# Altium PCB PCB1.PcbDoc (part 1 of 2)
Units mil, origin at the board's own origin, x right, y up, seen from the top; angles counter-clockwise.
Board outline 1275 x 805 mil, 4 copper layers (Top Layer, signal, gnd, Bottom Layer), stack 23.756 mil thick; 62 components, 87 nets, 336 pads, 208 vias.
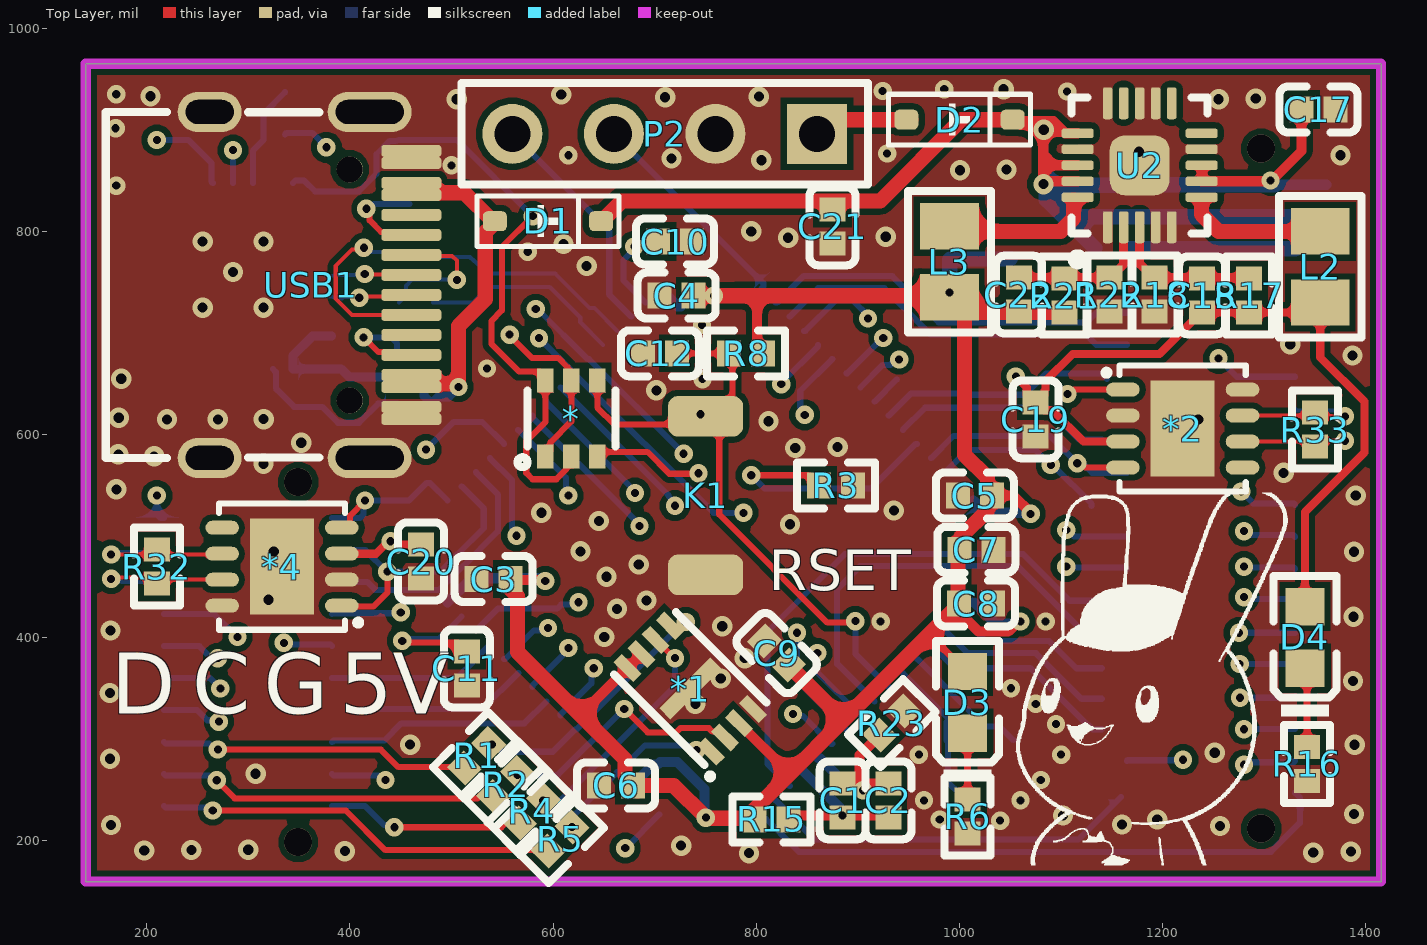
[diagram p0: Top Layer view]
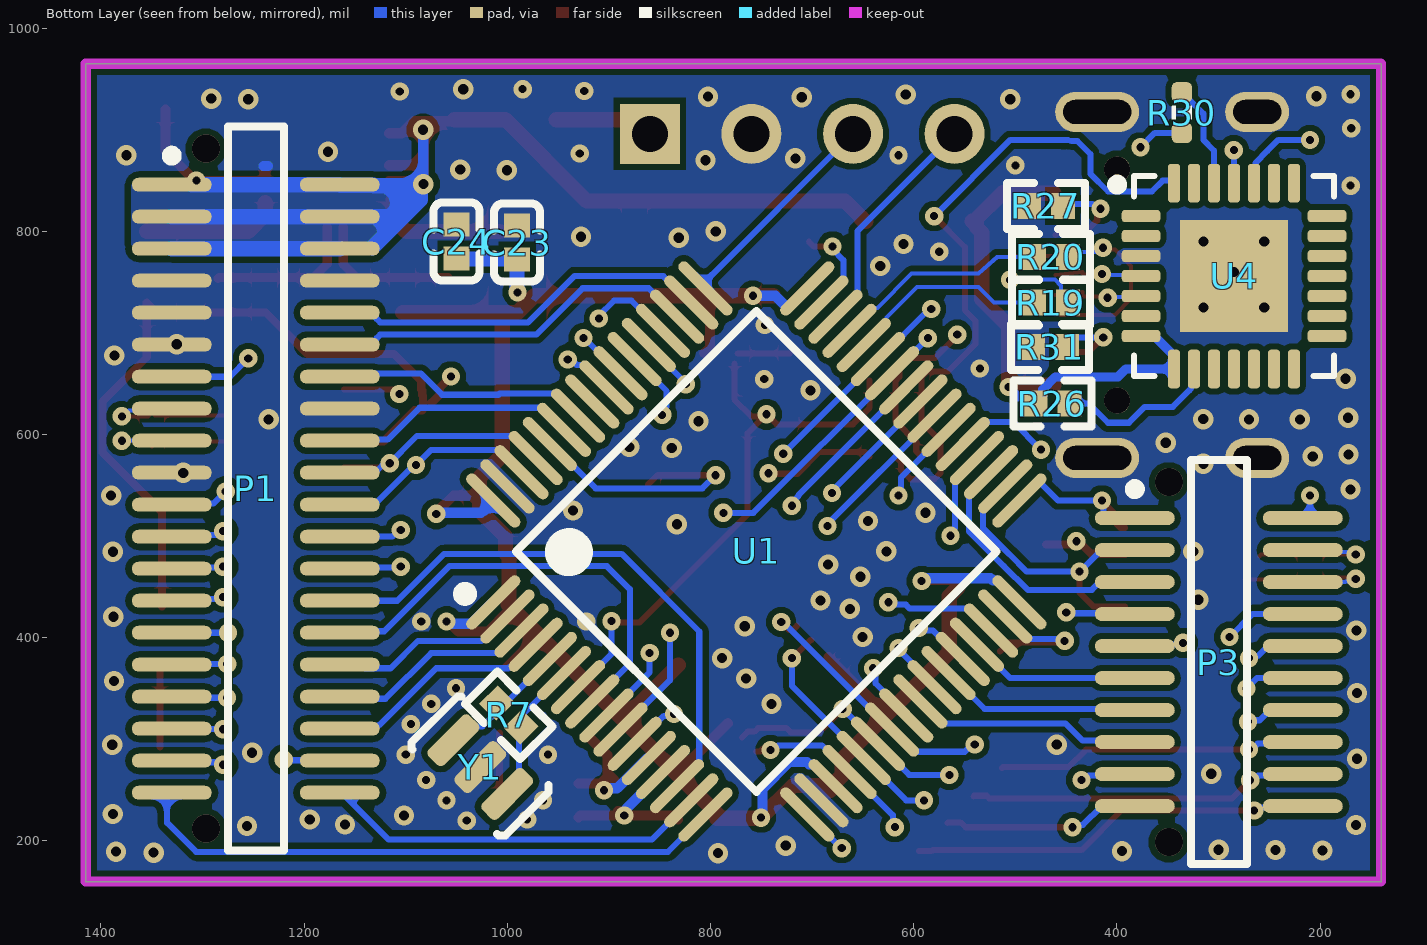
[diagram p1: Bottom Layer view, seen from below]
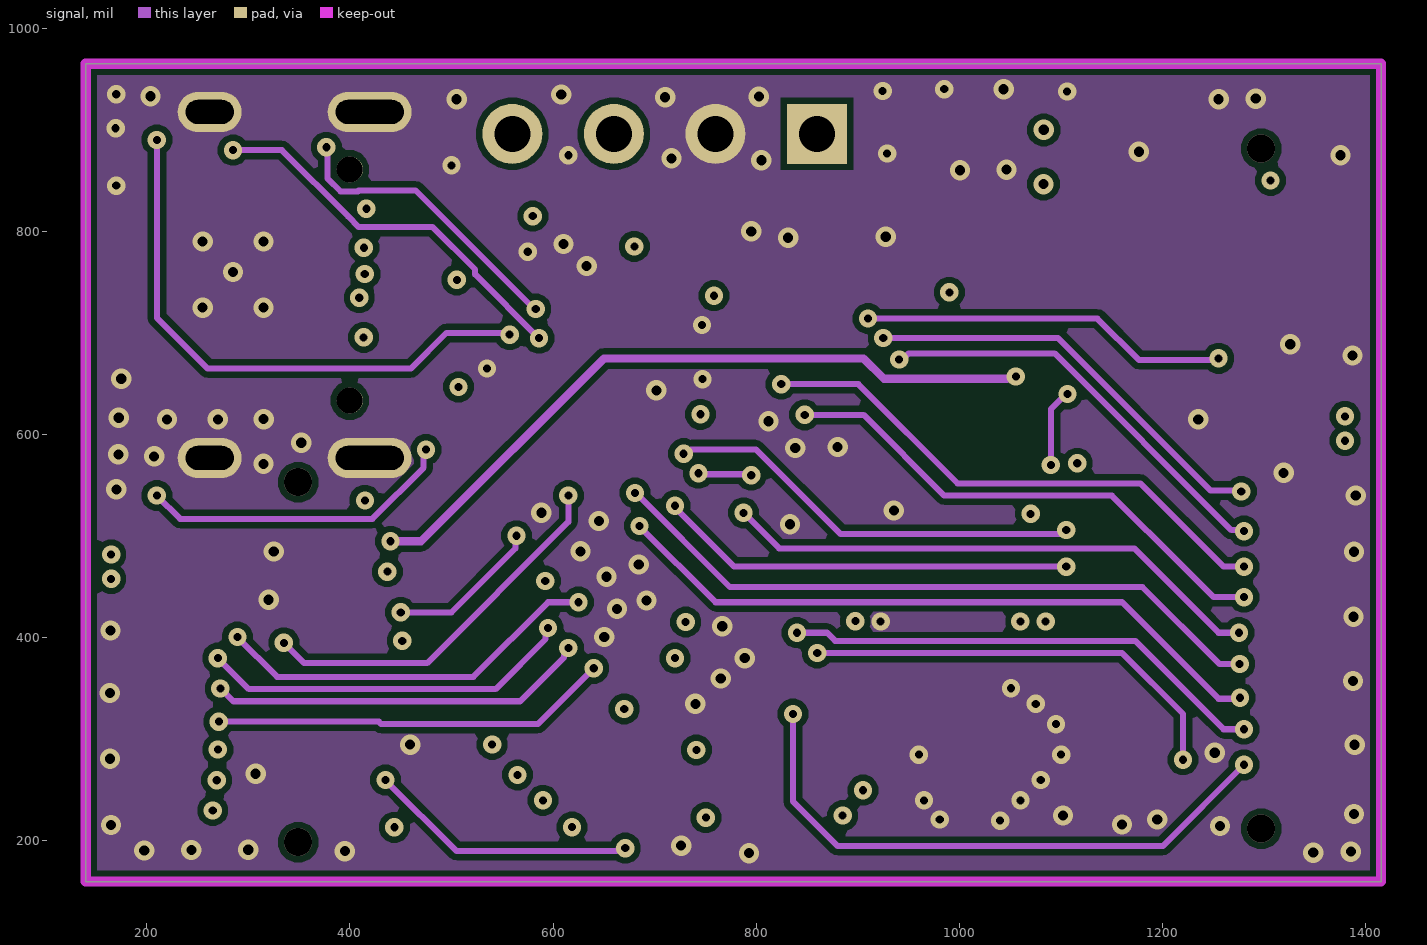
[diagram p2: signal]
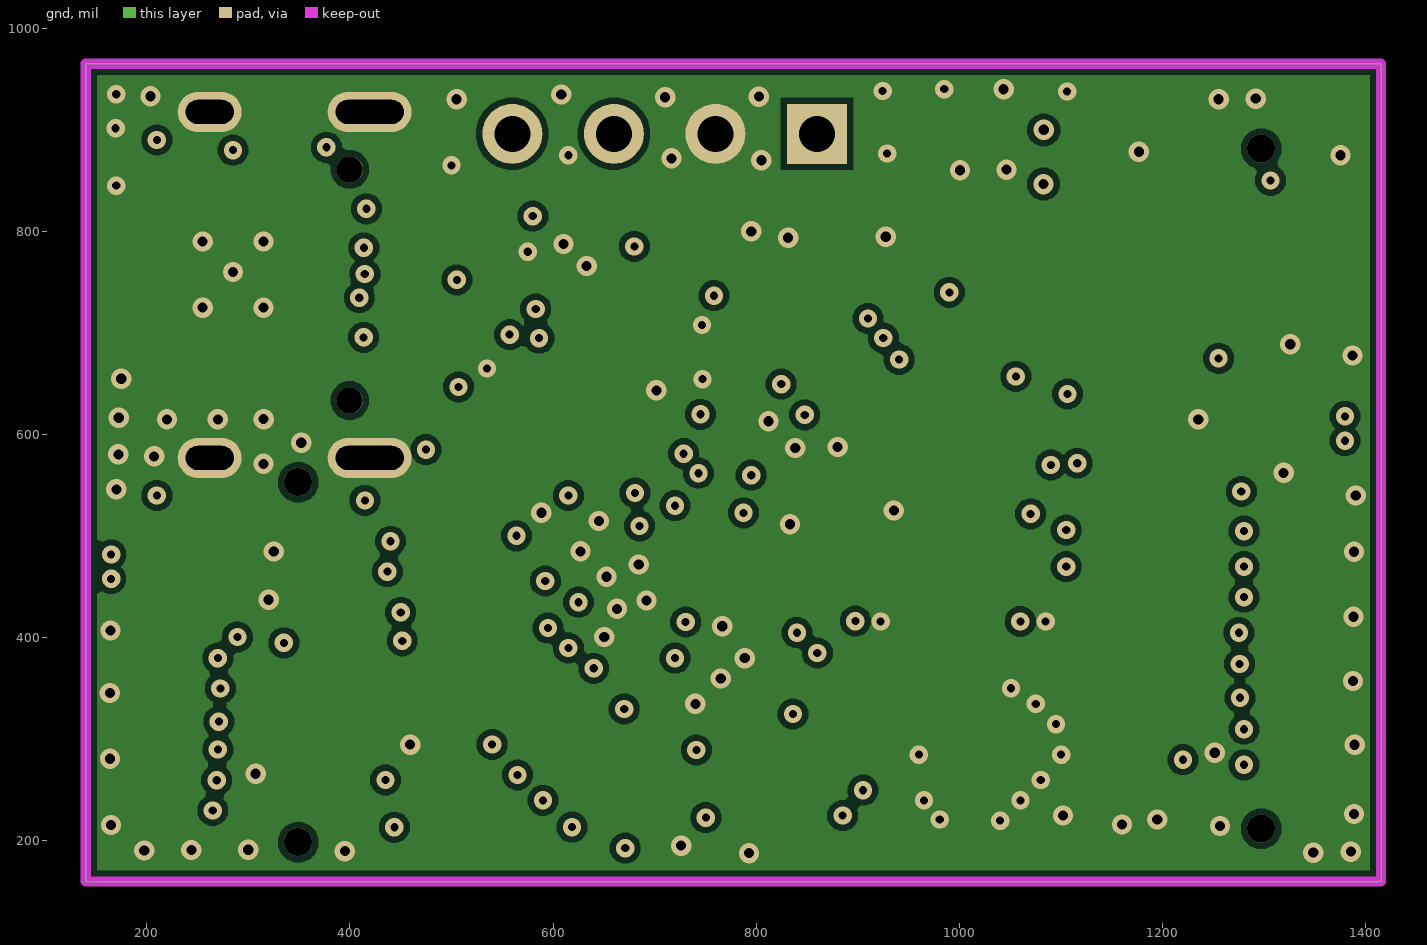
[diagram p3: gnd]
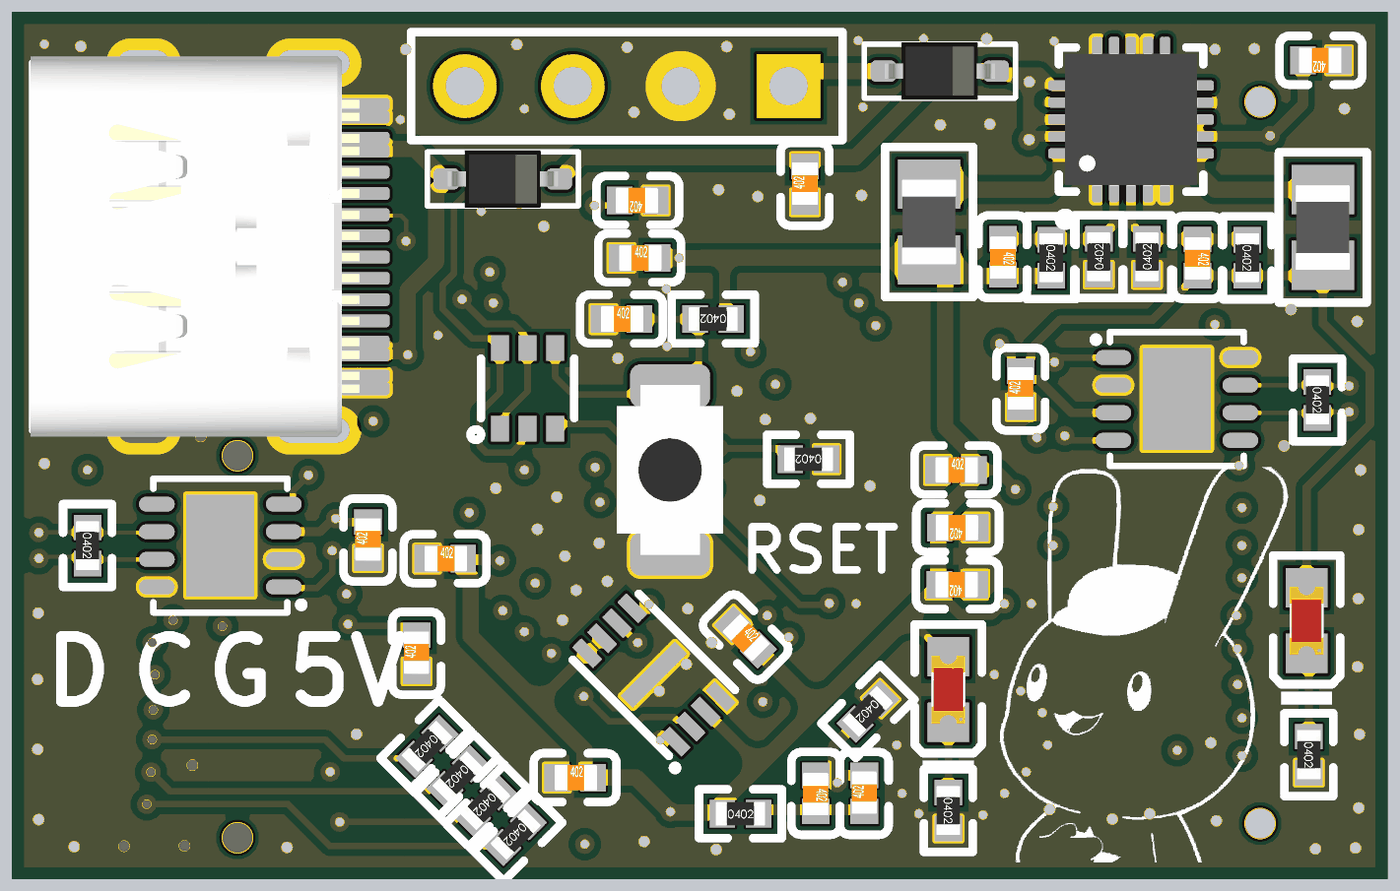
[diagram p5: 3D render of the assembled board from above, using the file's embedded part models]
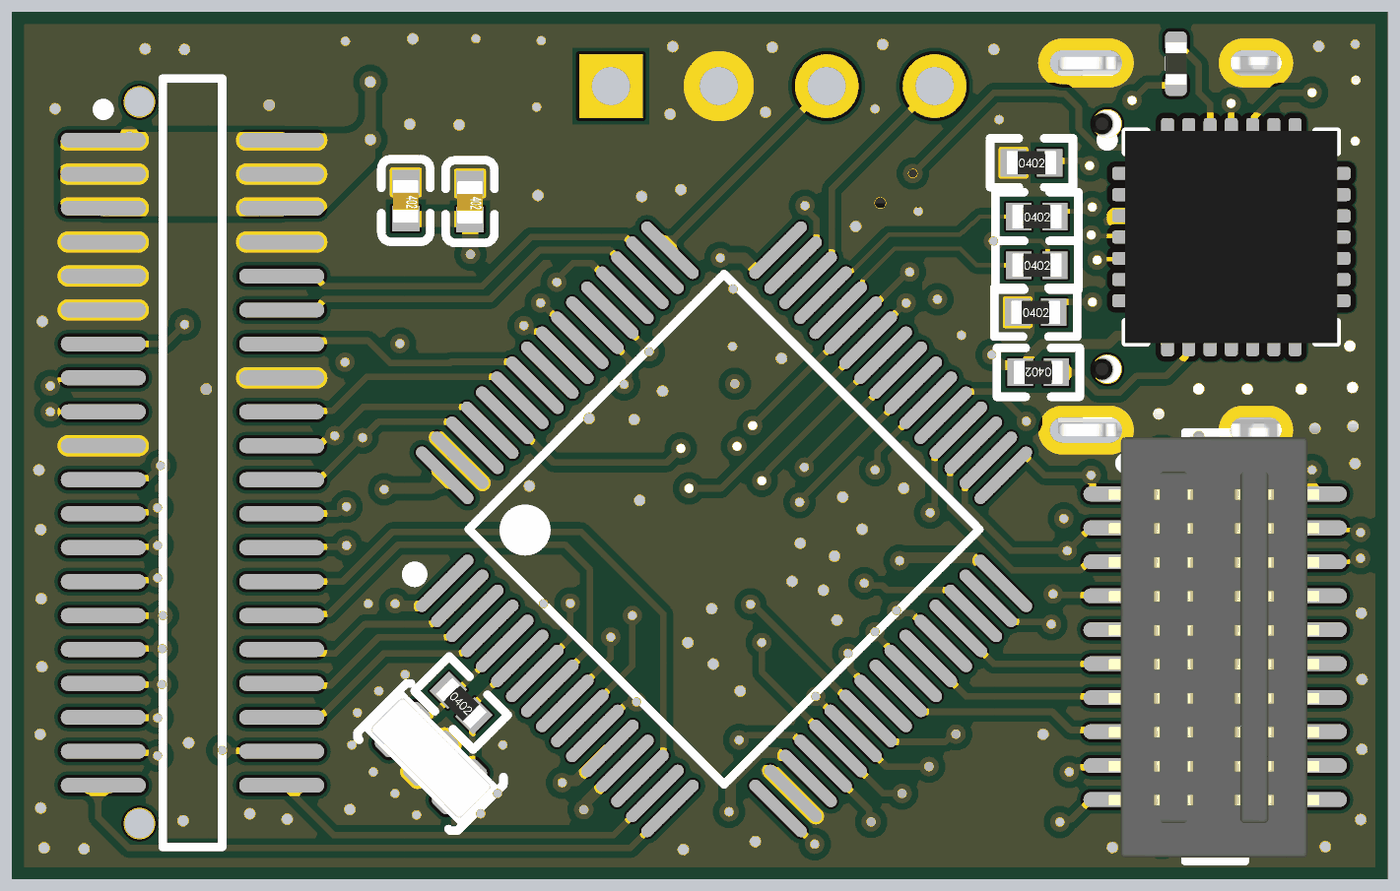
[diagram p6: 3D render of the assembled board from below, using the file's embedded part models]

## Layer stack, top to bottom
Top Solder: solder mask 0.4, Solder Resist, Dk 3.5
Top Layer: signal copper 1.4
Dielectric 2: prepreg 2.8, PP-006, Dk 4.1
signal: signal copper 1.378
Dielectric 1: dielectric 12.6, FR-4, Dk 4.8
gnd: signal copper 1.378
Dielectric 3: prepreg 2.8, PP-006, Dk 4.1
Bottom Layer: signal copper 1.4
Bottom Solder: solder mask 0.4, Solder Resist, Dk 3.5

## Board outline
140,160 1415,160 1415,965 140,965

## Design rules (kind name [scope] priority, off if disabled: settings)
Clearance [All] p1: gap=6 ignorepadtopadclearanceinfootprint=FALSE
ComponentClearance [All] p1: gap=0 collisioncheckmode=3 verticalgap=0 showdistances=FALSE
DiffPairsRouting [All] p1: maxlimit=9 minlimit=9 mostfreqgap=9 toplayer_minwidth=4 toplayer_maxwidth=4 toplayer_prefwidth=4 midlayer1_minwidth=4 midlayer1_maxwidth=4 midlayer1_prefwidth=4 midlayer2_minwidth=4 midlayer2_maxwidth=4 midlayer2_prefwidth=4 bottomlayer_minwidth=4 bottomlayer_maxwidth=4 bottomlayer_prefwidth=4 maxuncoupledlength=500
FanoutControl Fanout_BGA [All] p1: bgadir=Out bgaviamode=Centered fanoutstyle=Auto fanoutdirection=Alternating viagrid=1 // Fanout_BGA (Default Rule)
HoleSize [All] p1: absolutevalues=TRUE maxlimit=10000 minlimit=8 maxpercent=80.000 minpercent=20.000
MinimumSolderMaskSliver [All] p1 off: minsoldermaskwidth=2
PlaneClearance [All] p1: clearance=8
PlaneConnect [All] p1: planeconnectstyle=Direct reliefexpansion=20 reliefentries=4 reliefconductorwidth=10 reliefairgap=10
PolygonConnect [All] p1: connectstyle=Direct reliefconductorwidth=10 reliefentries=4 polygonreliefangle="90 Angle" airgapwidth=10
RoutingVias [All] p1: holewidth=8 width=16 viastyle="Through Hole" minholewidth=6 minwidth=12 maxholewidth=28 maxwidth=50
SilkToSilkClearance [All] p1: silktosilkclearance=0
SilkToSolderMaskClearance [IsPad] p1: minsilkscreentomaskgap=0 clearancetoexposedcopper=TRUE
SolderMaskExpansion [All] p1: expansion=3 istentingtop=FALSE
Width [All] p1: maxlimit=10000 minlimit=6 preferedwidth=6
21 further rules are at their usual default settings.

## Classes and differential pairs
component class main: *2 *4 D2 P1 P2 P3 R1 R2 R4 R5 R32 R33
component class Designator: * D1 R19 R20 R26 R27 R30 R31 U4 USB1
differential pair USB: +USB_P -USB_N
differential pair USBD: +USBD_P -USBD_n
differential pair D: +D_P -D_N
differential pair CAN2: +CAN2_P -CAN2_N
differential pair CAN1: +CAN1_P -CAN1_N

## Components (designator, comment, footprint, x,y, rotation, side; value= is the part's Value field where it differs from the comment)
* "UMH3N" SC-70-6(SOT-363) 615,590 r270 top locked
*1 "gd25q80" USON-8 728.12,367.84 r45 top locked
*2 "SIT1050TK" DFN3x3-8 1230,615 r270 top locked
*4 "SIT1050TK" DFN3x3-8 322.83,460.87 r90 top locked
C1 "10uF (106) 20% 6.3V" LC-0402_C 885,240 r270 top locked
C2 "100nF (104) 10% 16V" LC-0402_C 930,240 r90 top locked
C3 "100nF (104) 10% 16V" LC-0402_C 541.57,457.8 r0 top locked
C4 "100nF (104) 10% 16V" LC-0402_C 721.67,736.73 r0 top locked
C5 "100nF (104) 10% 16V" LC-0402_C 1015,540 r0 top locked
C6 "100nF (104) 10% 16V" LC-0402_C 661.9,254.69 r0 top locked
C7 "100nF (104) 10% 16V" LC-0402_C 1016.54,486.61 r180 top
C8 "100nF (104) 10% 16V" LC-0402_C 1016.24,433.66 r180 top locked
C9 "100nF (104) 10% 16V" LC-0402_C 820,385 r315 top locked
C10 "2.2uF (104) 10% 16V" LC-0402_C 720,790 r180 top locked
C11 "2.2uF (104) 10% 16V" LC-0402_C 515,370 r90 top locked
C12 "100nF (104) 10% 16V" LC-0402_C 705,680 r0 top locked
C17 "10uF (106) 20% 6.3V" LC-0402_C 1353.27,920 r180 top locked
C18 "220pF (221) 10% 50V" LC-0402_C 1238.81,737.06 r270 top locked
C19 "10uF (106) 20% 6.3V" LC-0402_C 1075,615 r90 top locked
C20 "100nF (104) 10% 16V" LC-0402_C 470,475 r90 top locked
C21 "10uF (106) 20% 6.3V" LC-0402_C 875,805 r90 top
C22 "220pF (221) 10% 50V" LC-0402_C 1058.46,737.71 r270 top locked
C23 "10uF (106) 20% 6.3V" LC-0402_C 990.42,789.02 r270 bottom locked
C24 "100nF (104) 10% 16V" LC-0402_C 1050,790 r270 bottom locked
D1 "二极管-5819W" SOD-323 595,810 r0 top locked
D2 "二极管-5819W" SOD-323 1000,910 r0 top locked
D3 "蓝灯 0603" LC-0603_LED_S1 1007.85,336.38 r90 top locked
D4 "蓝灯 0603" LC-0603_LED_S1 1340,400.31 r90 top locked
K1 "TACT 2P" ButtonTACT_3x4x2_180 750,540 r270 top locked value=3x4
L2 "2.2uH ±10%" LC-0805_L 1355,765.04 r270 top locked
L3 "2.2uH ±10%" LC-0805_L 990,770.04 r270 top locked
P1 "Header 20X2" HEADER_0.8mm_2x20P_G 1247.68,546.73 r180 bottom locked
P2 "Header 4" HDR1X4 859.82,896.05 r180 top locked
P3 "Header 10X2" HEAER_0.8mm_2x10P_M 299.82,376.05 r180 bottom locked
R1 "0Ω (0R0) ±1%" LC-0402_R 524.75,283.81 r225 top locked
R2 "0Ω (0R0) ±1%" LC-0402_R 553.21,255.64 r225 top locked
R3 "10KΩ (1002) ±1%" LC-0402_R 878.27,550 r180 top locked
R4 "0Ω (0R0) ±1%" LC-0402_R 578.77,229.5 r225 top locked
R5 "0Ω (0R0) ±1%" LC-0402_R 606.83,201.83 r225 top
R6 "3.3KΩ (3301) ±1%" LC-0402_R 1007.93,224.15 r270 top locked
R7 "1MΩ (1004) ±1%" LC-0402_R 998.6,323.88 r225 bottom locked
R8 "10KΩ (1002) ±1%" LC-0402_R 790,680 r180 top locked
R15 "0Ω (0R0) ±1%" LC-0402_R 815.19,221.2 r0 top locked
R16 "5.1KΩ (5101) ±1%" LC-0402_R 1342.04,275.96 r270 top locked
R17 "220KΩ (5103) ±1%" LC-0402_R 1285,736.73 r270 top locked
R18 "30KΩ (5103) ±1%" LC-0402_R 1191.96,737.72 r90 top locked
R19 "22Ω (22R0) ±1%" LC-0402_R 465,730 r180 bottom locked
R20 "22Ω (22R0) ±1%" LC-0402_R 465,775 r180 bottom locked
R21 "510KΩ (2203) ±1%" LC-0402_R 1103.19,736.89 r270 top locked
R22 "110KΩ (3302) ±1%" LC-0402_R 1147.42,737.82 r90 top locked
R23 "0Ω (0R0) ±1%" LC-0402_R 933.37,316.06 r225 top
R26 "10KΩ (1002) ±1%" LC-0402_R 463.65,630.57 r0 bottom locked
R27 "5.1KΩ (5101) ±1%" LC-0402_R 470,825 r180 bottom
R30 "200R" RES_0402 336.12,916.91 r90 bottom value=22R
R31 "5.1KΩ (5101) ±1%" LC-0402_R 466.13,686.35 r180 bottom
R32 "120Ω (1200) ±1%" LC-0402_R 210,470 r270 top locked
R33 "120Ω (1200) ±1%" LC-0402_R 1350,605 r270 top locked
U1 "STM32F405RGT6" LC-LQFP-64_10x10x05P 755,485 r225 bottom locked
U2 "EA3036" QFN-20 1177.29,865.09 r90 top locked
U4 "CP2102" QFN-28 284.82,756.05 r180 bottom locked value=Value
USB1 "Type-C" Type-C-TOP 361.24,747.27 r180 top locked
Y1 "8MHz" 晶振-3P 1026.64,272.8 r225 bottom locked

## Footprints (in the part's own frame and the unit in brackets; to place one, negate y for a bottom-side part, rotate by r counter-clockwise, add the part's x,y. Pads: shape width x height; smd on the part's side, far side on the other; paste and mask are expansions set on the pad)
ButtonTACT_3x4x2_180 [mil]
  rrect50% 40x74 smd: 1(-78,0) 2(78,0)
  body extent -79,-49 79,49, height 63
DFN3x3-8 [mm]
  oval 0.35x0.84 smd: 1(-0.744,-1.757) 2(-0.094,-1.757) 3(0.556,-1.757) 4(1.206,-1.757) 5(1.206,1.233) 6(0.556,1.233) 7(-0.094,1.233) 8(-0.744,1.233)
  rect 2.4x1.6 smd: 9(0.231,-0.262)
  silkscreen extent -1.35,-2.24 1.81,1.31
HDR1X4 [mm] "Connector; Header; 4 Position"
  rect 1.5x1.5 hole 0.9: 1(0,0)
  round 1.5 hole 0.9: 2(2.54,0) 3(5.08,0) 4(7.62,0)
  silkscreen extent -1.27,-1.27 8.89,1.27
HEADER_0.8mm_2x20P_G [mm] "0.8间距2x20P公座，SMD"
  oval 2x0.35 smd: 1(-2.1,7.6) 2(-2.1,6.8) 3(-2.1,6) 4(-2.1,5.2) 5(-2.1,4.4) 6(-2.1,3.6) 7(-2.1,2.8) 8(-2.1,2) 9(-2.1,1.2) 10(-2.1,0.4) 11(-2.1,-0.4) 12(-2.1,-1.2) 13(-2.1,-2) 14(-2.1,-2.8) 15(-2.1,-3.6) 16(-2.1,-4.4) 17(-2.1,-5.2) 18(-2.1,-6) 19(-2.1,-6.8) 20(-2.1,-7.6) 21(2.1,-7.6) 22(2.1,-6.8) 23(2.1,-6) 24(2.1,-5.2) 25(2.1,-4.4) 26(2.1,-3.6) 27(2.1,-2.8) 28(2.1,-2) 29(2.1,-1.2) 30(2.1,-0.4) 31(2.1,0.4) 32(2.1,1.2) 33(2.1,2) 34(2.1,2.8) 35(2.1,3.6) 36(2.1,4.4) 37(2.1,5.2) 38(2.1,6) 39(2.1,6.8) 40(2.1,7.6)
  silkscreen extent -2.23,-9.05 0.7,9.05, body extent -1.1,-9.05 1.1,9.05, height 2
HEAER_0.8mm_2x10P_M [mm] "底座，20*2P,公座"
  oval 2x0.35 smd: 1(-2.1,3.6) 2(-2.1,2.8) 3(-2.1,2) 4(-2.1,1.2) 5(-2.1,0.4) 6(-2.1,-0.4) 7(-2.1,-1.2) 8(-2.1,-2) 9(-2.1,-2.8) 10(-2.1,-3.6) 11(2.1,-3.6) 12(2.1,-2.8) 13(2.1,-2) 14(2.1,-1.2) 15(2.1,-0.4) 16(2.1,0.4) 17(2.1,1.2) 18(2.1,2) 19(2.1,2.8) 20(2.1,3.6)
  silkscreen extent -2.23,-5.05 0.7,5.05, body extent -2.51,-4.96 2.45,4.94, height 6
LC-0402_C [mm]
  rect 0.6x0.65 smd mask+0.051: 1(-0.425,0) 2(0.425,0)
  silkscreen extent -0.97,-0.58 0.98,0.58, body extent -0.48,-0.3 0.52,0.3, height 0.2
LC-0402_R [mm]
  rect 0.6x0.65 smd mask+0.051: 1(-0.425,0) 2(0.425,0)
  silkscreen extent -0.97,-0.58 0.97,0.58, body extent -0.57,-0.27 0.58,0.28, height 0.41
LC-0603_LED_S1 [mm]
  rect 0.93x0.98 smd: A(0.77,0) K(-0.77,0)
  silkscreen extent -1.98,-0.79 1.54,0.79, body extent -0.8,-0.4 0.8,0.4, height 0.6
LC-0805_L [mm]
  rect 1.16x1.47 smd: 1(-0.89,0) 2(0.89,0)
  silkscreen extent -1.77,-1.04 1.77,1.03, body extent -1,-0.64 1,0.64, height 0.6
LC-LQFP-64_10x10x05P [mm]
  oval 0.28x1.8 smd mask+0.051: 1(-3.75,-5.55) 2(-3.25,-5.55) 3(-2.75,-5.55) 4(-2.25,-5.55) 5(-1.75,-5.55) 6(-1.25,-5.55) 7(-0.75,-5.55) 8(-0.25,-5.55) 9(0.25,-5.55) 10(0.75,-5.55) 11(1.25,-5.55) 12(1.75,-5.55) 13(2.25,-5.55) 14(2.75,-5.55) 15(3.25,-5.55) 16(3.75,-5.55) 33(3.75,5.55) 34(3.25,5.55) 35(2.75,5.55) 36(2.25,5.55) 37(1.75,5.55) 38(1.25,5.55) 39(0.75,5.55) 40(0.25,5.55) 41(-0.25,5.55) 42(-0.75,5.55) 43(-1.25,5.55) 44(-1.75,5.55) 45(-2.25,5.55) 46(-2.75,5.55) 47(-3.25,5.55) 48(-3.75,5.55)
  oval 1.8x0.28 smd mask+0.051: 17(5.55,-3.75) 18(5.55,-3.25) 19(5.55,-2.75) 20(5.55,-2.25) 21(5.55,-1.75) 22(5.55,-1.25) 23(5.55,-0.75) 24(5.55,-0.25) 25(5.55,0.25) 26(5.55,0.75) 27(5.55,1.25) 28(5.55,1.75) 29(5.55,2.25) 30(5.55,2.75) 31(5.55,3.25) 32(5.55,3.75) 49(-5.55,3.75) 50(-5.55,3.25) 51(-5.55,2.75) 52(-5.55,2.25) 53(-5.55,1.75) 54(-5.55,1.25) 55(-5.55,0.75) 56(-5.55,0.25) 57(-5.55,-0.25) 58(-5.55,-0.75) 59(-5.55,-1.25) 60(-5.55,-1.75) 61(-5.55,-2.25) 62(-5.55,-2.75) 63(-5.55,-3.25) 64(-5.55,-3.75)
  silkscreen extent -4.55,-6.05 4.25,4.25
QFN-20 [mm]
  rrect50% 0.8x0.24 smd: 1(-1.55,0.8) 2(-1.55,0.4) 3(-1.55,0) 4(-1.55,-0.4) 5(-1.55,-0.8) 11(1.55,-0.8) 12(1.55,-0.4) 13(1.55,0) 14(1.55,0.4) 15(1.55,0.8)
  rrect50% 0.24x0.8 smd: 6(-0.8,-1.55) 7(-0.4,-1.55) 8(0,-1.55) 9(0.4,-1.55) 10(0.8,-1.55) 16(0.8,1.55) 17(0.4,1.55) 18(0,1.55) 19(-0.4,1.55) 20(-0.8,1.55)
  rrect50% 1.5x1.5 smd: 21(0,0)
  silkscreen extent -2.47,-1.7 1.7,1.7, body extent -1.56,-1.56 1.56,1.56, height 0.8
QFN-28 [mil]
  rrect50% 38x12 smd mask+5: 1(-91.5,59.06) 2(-91.5,39.37) 3(-91.5,19.68) 4(-91.5,0) 5(-91.5,-19.69) 6(-91.5,-39.37) 7(-91.5,-59.06) 15(91.5,-59.06) 16(91.5,-39.37) 17(91.5,-19.69) 18(91.5,0) 19(91.5,19.68) 20(91.5,39.37) 21(91.5,59.06)
  rrect50% 12x38 smd mask+5: 8(-59.06,-91.5) 9(-39.37,-91.5) 10(-19.69,-91.5) 11(0,-91.5) 12(19.68,-91.5) 13(39.37,-91.5) 14(59.06,-91.5) 22(59.06,91.5) 23(39.37,91.5) 24(19.69,91.5) 25(0,91.5) 26(-19.68,91.5) 27(-39.37,91.5) 28(-59.06,91.5)
  rect 106.3x110.24 smd: 29(0,0)
  silkscreen extent -120,-99 99,99, body extent -99,-99 98,98, height 35
RES_0402 [mil]
  rrect50% 20x20 smd: 1(-20,0) 2(20,0)
  silkscreen extent -7,-10 7,10, body extent -20,-10 20,10, height 14
SC-70-6(SOT-363) [mm]
  rect 0.6x0.42 smd: 1(0.295,-0.576) 2(0.295,0.074) 3(0.295,0.724) 4(-1.605,0.724) 5(-1.605,0.074) 6(-1.605,-0.576)
  silkscreen extent -1.35,-1.27 0.56,1.17
SOD-323 [mm]
  rrect50% 0.6x0.5 smd: 1(-1.329,0) 2(1.329,0)
  silkscreen extent -1.78,-0.64 1.78,0.64, body extent -1.3,-0.68 1.3,0.67, height 1.15
Type-C-TOP [mm]
  round 0.65 hole 0.65: 0(-0.98,2.89) 0(-0.98,-2.89)
  oval 1.6x1 hole 0.6 slot 1.2 at 0 deg: 1(2.52,4.325) 2(2.52,-4.325)
  oval 2.1x1 hole 0.6 slot 1.7 at 0 deg: 3(-1.48,-4.325) 4(-1.48,4.325)
  rrect50% 1.5x0.3 smd: A1(-2.52,-3.35) A4(-2.52,-2.55) A5(-2.52,-1.25) A6(-2.52,-0.25) A7(-2.52,0.25) A8(-2.52,1.25) A9(-2.52,2.55) A12(-2.52,3.35) B1(-2.52,3.05) B4(-2.52,2.25) B5(-2.52,1.75) B6(-2.52,0.75) B7(-2.52,-0.75) B8(-2.52,-1.75) B9(-2.52,-2.25) B12(-2.52,-3.05)
  silkscreen extent -0.22,-4.33 5.12,4.33, body extent -2.57,-4.48 5.18,4.47, height 3.26
USON-8 [mm]
  rect 0.3x0.7 smd: 1(-0.947,-1.917) 2(-0.447,-1.917) 3(0.053,-1.917) 4(0.553,-1.917) 5(0.553,1.029) 6(0.053,1.029) 7(-0.447,1.029) 8(-0.947,1.029)
  rect 1.8x0.4 smd: 9(-0.197,-0.444)
  silkscreen extent -1.4,-2.35 0.9,1.16
晶振-3P [mm]
  rrect50% 0.55x1.45 smd: 1(-0.95,0) 2(0,0) 3(0.95,0)
  silkscreen extent -1.65,-0.89 1.65,0.91, body extent -1.6,-0.89 1.65,0.89, height 0.7

## Part data
C1 C17 C19 C21 C23: library part "0402 10uF (106) 20% 6.3V", "贴片电容", Package=0402, SuppliersPartNumber=C15525, ComponentLink1Description=供应商链接, ComponentLink1URL=http://www.szlcsc.com/product/details_16204.html, Supplier=LC
C2 C3 C4 C5 C6 C7 C8 C9 C10 C11 C12 C20 C24: library part "0402 100nF (104) 10% 16V", "贴片电容", Package=0402, SuppliersPartNumber=C1525, ComponentLink1Description=供应商链接, ComponentLink1URL=http://www.szlcsc.com/product/details_1877.html, Supplier=LC
C18 C22: library part "0402 220pF (221) 10% 50V", "贴片电容", Package=0402, SuppliersPartNumber=C1530, ComponentLink1Description=供应商链接, ComponentLink1URL=http://www.szlcsc.com/product/details_1882.html, Supplier=LC
D1 D2: "40V"
D3 D4: library part "0603 蓝灯", "发光二极管", Package=0603, SuppliersPartNumber=C72041, ComponentLink1Description=供应商链接, ComponentLink1URL=http://www.szlcsc.com/product/details_73150.html, Supplier=LC
K1: library part ButtonTACT_3x4x2_180, "Button", Type="TACT 2P"
L2 L3: library part "0805 2.2uH 10%", "贴片电感", Package=0805, SuppliersPartNumber=C1043, ComponentLink1Description=供应商链接, ComponentLink1URL=http://www.szlcsc.com/product/details_1395.html, Supplier=LC
P1: "Header, 20-Pin, Dual row", LatestRevisionDate=17-Jul-2002, LatestRevisionNote="Re-released for DXP Platform.", Publisher="Altium Limited"
P2: "Header, 4-Pin", LatestRevisionDate=17-Jul-2002, LatestRevisionNote="Re-released for DXP Platform.", Publisher="Altium Limited"
P3: "Header, 10-Pin, Dual row", LatestRevisionDate=17-Jul-2002, LatestRevisionNote="Re-released for DXP Platform.", Publisher="Altium Limited"
R1 R2 R4 R5 R15 R23: library part "0402 0Ω (0R0) 1%", "贴片电阻", Package=0402, SuppliersPartNumber=C17168, ComponentLink1Description=供应商链接, ComponentLink1URL=http://www.szlcsc.com/product/details_17853.html, Supplier=LC
R3 R8 R26: library part "0402 10KΩ (1002) 1%", "贴片电阻", Package=0402, SuppliersPartNumber=C25744, ComponentLink1Description=供应商链接, ComponentLink1URL=http://www.szlcsc.com/product/details_26487.html, Supplier=LC
R6: library part "0402 3.3KΩ (3301) 1%", "贴片电阻", Package=0402, SuppliersPartNumber=C25890, ComponentLink1Description=供应商链接, ComponentLink1URL=http://www.szlcsc.com/product/details_26633.html, Supplier=LC
R7: library part "0402 1MΩ (1004) 1%", "贴片电阻", Package=0402, SuppliersPartNumber=C26083, ComponentLink1Description=供应商链接, ComponentLink1URL=http://www.szlcsc.com/product/details_26826.html, Supplier=LC
R16 R27 R31: library part "0402 5.1KΩ (5101) 1%", "贴片电阻", Package=0402, SuppliersPartNumber=C25905, ComponentLink1Description=供应商链接, ComponentLink1URL=http://www.szlcsc.com/product/details_26648.html, Supplier=LC
R17 R18: library part "0402 510KΩ (5103) 1%", "贴片电阻", Package=0402, SuppliersPartNumber=C11616, ComponentLink1Description=供应商链接, ComponentLink1URL=http://www.szlcsc.com/product/details_12170.html, Supplier=LC
R19 R20: library part "0402 22Ω (22R0) 1%", "贴片电阻", Package=0402, SuppliersPartNumber=C25092, ComponentLink1Description=供应商链接, ComponentLink1URL=http://www.szlcsc.com/product/details_25835.html, Supplier=LC
R21: library part "0402 220KΩ (2203) 1%", "贴片电阻", Package=0402, SuppliersPartNumber=C25767, ComponentLink1Description=供应商链接, ComponentLink1URL=http://www.szlcsc.com/product/details_26510.html, Supplier=LC
R22: library part "0402 33KΩ (3302) 1%", "贴片电阻", Package=0402, SuppliersPartNumber=C25779, ComponentLink1Description=供应商链接, ComponentLink1URL=http://www.szlcsc.com/product/details_26522.html, Supplier=LC
R30: library part 电阻-0402, "Resistor"
R32 R33: library part "0402 120Ω (1200) 1%", "贴片电阻", Package=0402, SuppliersPartNumber=C25079, ComponentLink1Description=供应商链接, ComponentLink1URL=http://www.szlcsc.com/product/details_25822.html, Supplier=LC
U1: "ARM", Package=LQFP-64_10x10x05P, SuppliersPartNumber=C15742, ComponentLink1Description=供应商链接, ComponentLink1URL=http://www.szlcsc.com/product/details_16424.html, Supplier=LC
U2: "EA3036 is a 3CH power management IC for applications powered by one Li-Ion battery or a DC 5V adapter."
U4: "USB转TTL", MFG #1="SILICON LABS", PART DESC="SINGLE-CHIP USB TO UART BRIDGE, QFN28, RoHS.", PART NUMBER=CP2102, RefDes=RefDes, Type=DEV
USB1: library part USB-Type-C-TOP
Y1: library part 晶振-3Pin, "村田贴片"

## Via types
v1: diameter 18, hole 8, Top Layer to Bottom Layer, tented both sides, 118 vias
v2: diameter 20, hole 10, Top Layer to Bottom Layer, tented both sides, 85 vias
v3: diameter 27.56, hole 27.56, Top Layer to Bottom Layer, 4 vias
v4: diameter 18, hole 7.87, Top Layer to Bottom Layer, tented both sides, 1 vias

## Nets (pads, with @x,y where several pads share a name; then routed paths per layer and width w, separated by ;. In a path a pad name is that pad's centre, name@x,y a point inside that pad or via, vN(x,y) a via of type N, cw(c..) or ccw(c..) an arc to the next point about the centre after c; other vN are vias at no path point)
2: P1.25 U1.2 | length 161.1
  Bottom Layer w6: U1.2@999.98,420.97 1001.34,420.97 1025.31,397 1088,397 1115,370 P1.25@1140,370
3: P1.24 U1.3 | length 181.7
  Bottom Layer w6: U1.3@986.06,407.05 1008.11,385 1075,385 1120,340 P1.24@1140,340
4: P1.23 U1.4 | length 202.3
  Bottom Layer w6: U1.4@972.14,393.13 994.26,371.01 997.81,371.01 998.83,370 1070,370 1125.77,314.23 1126.69,314.23 1130.93,310 P1.23@1140,310
8: P1.26 U1.8 | length 447.8
  Bottom Layer w6: U1.8@916.47,337.45 879.49,374.43 879.49,447.95 902.1,470.56 1057.15,470.56 1121.23,406.48 1163.52,406.48 P1.26@1165,405
9: P1.22 U1.9 | length 564.3
  signal w6: v1(860,385) 1160,385 1220,325 v1(1220,280)
  Bottom Layer w6: v1(860,385) 860,366.08 U1.9@902.55,323.53 ; P1.22@1165,279.02 1165.49,279.51 1219.51,279.51 v1(1220,280)
10: P1.18 U1.10 | length 645.4
  signal w6: v1(840,405) 869.69,405 877.69,397 1173,397 1260,310 v1(1280,310)
  Bottom Layer w6: v1(840,405) 840,358.24 U1.10@888.63,309.62 ; v1(1280,310) 1280.26,310.26 1330.1,310.26 P1.18@1330.35,310.51
11: P1.19 U1.11 | length 684.1
  signal w6: v1(836.08,325) 836.08,238.92 880,195 1200,195 v1(1280,275)
  Bottom Layer w6: v1(836.08,325) 837.99,323.09 845.96,323.09 873.35,295.7 U1.11@874.71,295.7 ; v1(1280,275) 1282.71,275 1285.23,277.53 1328.87,277.53 P1.19@1330.35,279.02
14: P1.27 U1.14 | length 544.3
  Bottom Layer w6: U1.14@832.95,253.94 811.2,275.69 811.2,406.2 887.56,482.56 1062.35,482.56 1108.41,436.5 P1.27@1143.5,436.5
15: P1.21 U1.15 | length 373.1
  Bottom Layer w6: U1.15@819.03,240.02 857.74,201.31 1116.93,201.31 P1.21@1158.75,243.12
16: P1.20 U1.16 | length 588.5
  Bottom Layer w6: U1.16@805.11,226.1 841.9,189.31 1306.33,189.31 1335,217.98 1335,242.87 P1.20@1330.35,247.52
17: P3.9 U1.17 | length 368.7
  signal w6: v1(435,260) 505,190 662.44,190 663.52,191.08 669.05,191.08 v1(670.96,192.99)
  Bottom Layer w6: P3.9@382.5,265.81 383.99,264.33 427.97,264.33 432.29,260 v1(435,260) ; v1(670.96,192.99) 671.37,192.99 704.48,226.1 U1.17@704.89,226.1
20: P3.11 R5.2 | length 396.2
  Top Layer w6: v1(265,230) 395.96,230 434.85,191.11 581.43,191.11 582.54,190 R5.2@595,190
  Bottom Layer w6: P3.11@217.15,234.32 218.64,232.83 258.92,232.83 261.75,230 v1(265,230)
21: P3.10 R4.2 | length 195.3
  Top Layer w6: v1(443.76,213.49) 549.03,213.49 553.84,218.3 566.3,218.3 R4.2@566.94,217.66
  Bottom Layer w6: P3.10@382.5,234.32 414.98,234.32 433.51,215.79 441.46,215.79 v1(443.76,213.49)
22: P3.12 R2.2 | length 335.4
  Top Layer w6: v1(268.92,259.78) 286.7,242 525.73,242 528.23,244.5 540.69,244.5 R2.2@541.38,243.8
  Bottom Layer w6: P3.12@217.15,265.81 218.64,264.33 261.12,264.33 265.67,259.78 v1(268.92,259.78)
23: P3.13 R1.2 | length 306.3
  Top Layer w6: v1(270,290) 430.46,290 447.78,272.67 512.22,272.67 R1.2@512.92,271.98
  Bottom Layer w6: P3.13@217.15,297.31 218.64,295.82 261.47,295.82 267.29,290 v1(270,290)
24: P3.14 U1.24 | length 511.3
  signal w6: v1(270.97,317.48) 428.37,317.48 430.85,315 585,315 v1(640,370)
  Bottom Layer w6: P3.14@217.15,328.81 249.63,328.81 259.56,318.88 269.58,318.88 v1(270.97,317.48) ; U1.24@607.45,323.53 607.45,324.89 637.7,355.14 637.7,367.7 v1(640,370)
25: P3.8 U1.25 | length 227.7
  Bottom Layer w6: P3.8@382.5,297.31 383.99,298.8 433.8,298.8 450.7,315.7 571.78,315.7 U1.25@593.53,337.45
26: P3.15 U1.26 | length 485.2
  signal w6: v1(272.5,350.12) 272.75,350.12 285.35,337.51 567.51,337.51 610.77,380.77 610.77,382.52 615,386.75 v1(615,390)
  Bottom Layer w6: P3.15@217.15,360.3 262.31,360.3 v1(272.5,350.12) ; U1.26@579.62,351.37 579.62,352.73 615,388.12 v1(615,390)
27: P3.7 U1.27 | length 165.3
  Bottom Layer w6: P3.7@415,330 530.4,330 U1.27@565.7,365.29
28: P3.16 U1.28 | length 481
  signal w6: v1(270,380) 300.49,349.51 543.4,349.51 592.7,398.82 592.7,407.25 v1(595,409.54)
  Bottom Layer w6: P3.16@217.15,391.8 251.73,391.8 261.62,381.91 268.09,381.91 v1(270,380) ; U1.28@551.78,379.21 553.14,379.21 581.17,407.25 592.7,407.25 v1(595,409.54)
29: P3.6 U1.29 | length 169
  Bottom Layer w6: P3.6@382.5,360.3 505.03,360.3 U1.29@537.86,393.13
30: P3.17 U1.30 | length 576.5
  signal w6: v1(289.26,400.74) 328.49,361.51 521.51,361.51 595,435 v1(625,435)
  Bottom Layer w6: P3.17@217.15,423.29 266.71,423.29 v1(289.26,400.74) ; U1.30@523.94,407.05 545.69,428.8 604,428.8 607.9,432.7 622.7,432.7 v1(625,435)
35: P3.3 U1.35 | length 250
  Bottom Layer w6: P3.3@390,455 416.88,455 424.79,447.08 487.77,447.08 511.25,470.56 511.36,470.56 545.69,504.89 545.69,541.2 U1.35@523.94,562.95
36: P3.4 U1.36 | length 307.4
  signal w6: v1(450,425) 500,425 562.97,487.97 562.97,499.41 v1(563.97,500.42)
  Bottom Layer w6: P3.4@382.5,423.29 383.35,424.15 449.15,424.15 v1(450,425) ; U1.36@537.86,576.87 559.61,555.12 559.61,508.03 563.97,503.66 v1(563.97,500.42)
37: P3.20 U1.37 | length 436.1
  signal w6: v1(210,540) 233,517 422,517 472.57,567.57 472.57,582.89 v1(474.87,585.18)
  Bottom Layer w6: v1(210,540) 210,521.38 213.59,517.78 P3.20@217.15,517.78 ; v1(474.87,585.18) 502.22,612.54 530.03,612.54 U1.37@551.78,590.79
38: P3.5 U1.38 | length 505.8
  signal w6: v1(335,395) 355.04,375 475.91,375 615,514.09 v1(615,540)
  Bottom Layer w6: v1(335,395) 336.71,393.29 381.01,393.29 P3.5@382.5,391.8 ; U1.38@565.7,604.71 565.7,604.51 612.7,557.5 612.7,542.3 v1(615,540)
39: P1.17 U1.39 | length 868.9
  signal w6: v1(685,510.12) 685,510 760,435 1160,435 1255,340 1275,340 v1(1276,341)
  Bottom Layer w6: U1.39@579.62,618.63 579.62,617.27 685,511.88 v1(685,510.12) ; v1(1276,341) 1329.35,341 P1.17@1330.35,342.01
40: P1.16 U1.40 | length 845.8
  signal w6: v1(680.58,542.58) 681.46,542.58 774.04,450 1180,450 1255.72,374.28 v1(1275.75,374.25)
  Bottom Layer w6: U1.40@593.53,632.55 593.53,631.19 680.58,544.14 v1(680.58,542.58) ; v1(1275.75,374.25) 1329.61,374.25 P1.16@1330.35,373.5
41: P1.28 U1.41 | length 634.9
  signal w6: v1(720,530) 720,528.08 778.08,470 v1(1105,470)
  Bottom Layer w6: U1.41@607.45,646.47 713.56,540.36 713.56,539.51 720,533.07 v1(720,530) ; v1(1105,470) 1106,469 1164,469 P1.28@1165,467.99
50: P1.36 U1.50 | length 379.6
  Bottom Layer w6: U1.50@819.03,729.98 820.39,729.98 846.41,756 934,756 979.6,710.4 1125.12,710.4 1128.63,713.92 ; 1128.63,713.97 1134.62,719.96 P1.36@1165,719.96
51: P1.35 U1.51 | length 366.9
  Bottom Layer w6: U1.51@832.95,716.06 860.89,744 926,744 971.6,698.4 1125.12,698.4 1128.63,694.89 1128.63,694.46 1134.62,688.46 P1.35@1165,688.46
52: P1.7 U1.52 | length 529.8
  signal w6: v1(910,714.23) 1135.77,714.23 1176.49,673.51 1253.51,673.51 v1(1255,675)
  Bottom Layer w6: U1.52@846.87,702.14 848.23,702.14 878.08,732 895,732 910,717 v1(910,714.23) ; v1(1255,675) 1273.03,656.97 P1.7@1330.35,656.97
53: P1.13 U1.53 | length 634.7
  signal w6: v1(824.51,649.62) 900.38,649.62 998,552 1178,552 1260,470 v1(1280,470)
  Bottom Layer w6: v1(824.51,649.62) 824.51,650.78 860.79,687.06 U1.53@860.79,688.22 ; v1(1280,470) 1281,469 1329.35,469 P1.13@1330.35,467.99
54: P1.14 U1.54 | length 628.2
  signal w6: v1(847.66,619.44) 905.56,619.44 985,540 1150.03,540 1220.03,470 1250.03,440 v1(1280,440)
  Bottom Layer w6: v1(847.66,619.44) 847.66,622.68 843.29,627.05 843.29,642.89 U1.54@874.71,674.3 ; v1(1280,440) 1282.71,440 1284.72,437.98 1328.87,437.98 P1.14@1330.35,436.5
55: P1.11 U1.55 | length 523.6
  signal w6: v1(925,695) 1096.97,695 1246.97,545 v1@1277.33,545
  Bottom Layer w6: U1.55@888.63,660.38 889.51,660.38 924.12,695 v1(925,695) ; v1(1277.33,544.04) 1289.1,532.27 1329.07,532.27 P1.11@1330.35,530.98
56: P1.12 U1.56 | length 516.5
  signal w6: v1(940.58,674) 943.83,674 949.83,680 1093.67,680 1267.61,506.06 1278.93,506.06 v1(1280,505)
  Bottom Layer w6: U1.56@902.55,646.47 924.66,668.58 931.92,668.58 937.34,674 v1(940.58,674) ; v1(1280,505) 1282.71,505 1286.73,500.98 1328.87,500.98 P1.12@1330.35,499.49
57: U1.57 | length 30.8
  Bottom Layer w6: U1.57@916.47,632.55 U1.57@938.22,654.3
58: P1.34 U1.58 | length 234.7
  Bottom Layer w6: U1.58@930.38,618.63 952.13,640.38 1007.82,640.38 1008.94,639.26 1064.26,639.26 1085,660 1140,660 P1.34@1145,655
59: P1.32 U1.59 | length 217.7
  Bottom Layer w6: U1.59@944.3,604.71 966.05,626.46 1086.36,626.46 1117.81,595 P1.32@1140,595
AGND: C1.1 C2.2 R23.2 U1.12 | length 158.9
  Top Layer w10: 899.57,264.96 895,260.38 905,250.38 v1(905,250) ; R23.2@921.54,304.23 913.65,296.35 901.63,284.32 901.63,262.9 907.8,256.73 C2.2@930,256.73
  Bottom Layer w10: U1.12@860.79,281.78 862.15,281.78 892.01,251.91 903.09,251.91 v1(905,250)
AVCC3V3: C1.2 C2.1 R15.2 U1.13 | length 164.9
  Top Layer w10: R15.2@831.92,221.2 835.72,225 928.27,225 C2.1@930,223.27 ; C1.2@885,229.41 C1.2@890.89,229.41
  Bottom Layer w10: U1.13@846.87,267.86 883.09,231.64 883.09,226.91 v1(885,225)
BOOT0: *.3 R3.2 U1.60 | length 421.2
  Top Layer w6: *.3@643.51,578.38 647.97,582.85 693,582.85 714.34,561.5 742.5,561.5 v1(743,562) ; v1(795,560) 851.54,560 851.74,559.8 852.72,559.8 861.54,550.98 R3.2@861.54,550
  signal w6: v1(743,562) 744,561 794,561 v1(795,560)
  Bottom Layer w6: v1(795,560) 808,547 913.22,547 957.01,590.79 U1.60@958.22,590.79
CAN1_N: *2.6 P1.9 R33.2 | length 154.3
  Top Layer w4: *2.6@1278.55,593.11 1345.15,593.11 R33.2@1350,588.27 1355.7,593.97 v1(1379.44,593.97)
  Bottom Layer w4: P1.9@1330.35,593.98 v1(1379.44,593.97)
CAN1_P: *2.7 P1.8 R33.1 | length 155.9
  Top Layer w4: *2.7@1278.55,618.7 1346.97,618.7 R33.1@1350,621.73 1353.77,617.97 v1(1379.44,617.97)
  Bottom Layer w4: P1.8@1330.35,625.47 1332.23,623.6 1372.49,623.6 1378.12,617.97 v1(1379.44,617.97)
CAN1_Rx: *2.4 P1.31 U1.61 | length 263.6
  Top Layer w6: v1(1115.85,571.79) 1119.1,571.79 1123.37,567.52 *2.4@1160.84,567.52
  Bottom Layer w6: U1.61@972.14,576.87 993.89,598.62 1089.02,598.62 1118.15,569.5 1123.4,569.5 1130.41,562.48 P1.31@1165,562.48
CAN1_Tx: *2.1 P1.30 U1.62 | length 310.5
  Top Layer w6: v1(1106.35,640) 1107.71,640 1112,644.29 *2.1@1160.84,644.29
  signal w6: v1(1089.94,570) 1089.94,624.94 1105,640 v1(1106.35,640)
  Bottom Layer w6: U1.62@986.06,562.95 1007.81,584.7 1075.24,584.7 1091.15,568.79 1092.93,568.79 1130,531.72 P1.30@1130,530
CAN2_N: *4.6 P3.19 R32.1 | length 153.7
  Top Layer w4: v1(165,482) 205.27,482 R32.1@210,486.73 214.85,481.89 258.11,481.89 *4.6@260,480
  Bottom Layer w4: v1(165,482) 167.42,484.42 215.28,484.42 P3.19@217.15,486.29
CAN2_P: *4.7 P3.18 R32.2 | length 167.6
  Top Layer w4: v1(165,458) 166.54,459.54 203.73,459.54 R32.2@210,453.27 213.9,457.17 *4.7@274.28,457.17
  Bottom Layer w4: v1(165,458) 167.68,455.32 175.25,455.32 175.78,454.79 P3.18@217.15,454.79
CAN2_Rx: *4.4 P3.1 U1.33 | length 181.6
  Top Layer w6: *4.4@392,508.35 396.64,508.35 400.23,511.94 400.23,520.23 414.77,534.77 v1(414.77,535.23)
  Bottom Layer w6: P3.1@382.5,517.78 409.9,517.78 413.49,521.38 413.38,521.38 413.38,533.83 v1(414.77,535.23) ; v1@415,535 457.92,535 475.42,552.51 478.7,552.51 U1.33@496.1,535.11
CAN2_Tx: *4.1 P3.2 U1.34 | length 296.2
  Top Layer w6: *4.1@392,430.71 423,430.71 436.84,444.54 v1(436.84,465.08)
  Bottom Layer w6: P3.2@382.5,486.29 415.31,486.29 436.51,465.08 v1(436.84,465.08) ; v1@437.65,465.08 488.8,465.08 506.27,482.56 506.39,482.56 531.77,507.94 531.77,527.28 U1.34@510.02,549.03
D_N: R19.2 USB1.B7 | length 138.2
  Top Layer w4: USB1.B7@460.45,776.8 461.35,775.9 500.67,775.9 505.24,771.33 v1(505.24,752.29)
  Bottom Layer w4: R19.2@448.27,730 455,736.73 455,746.47 461.03,752.5 505.03,752.5 v1(505.24,752.29)
D_P: R20.2 USB1.B6 | length 186.6
  Top Layer w4: v1(413.69,783.86) 411.99,782.17 402.17,782.17 386.04,766.04 386.04,733.79 402.15,717.68 417.54,717.68 417.6,717.74 USB1.B6@460.45,717.74
  Bottom Layer w4: v1(413.69,783.86) 416.93,783.86 420.89,779.9 443.37,779.9 R20.2@448.27,775
DTR: *.2 *.6 U4.28 | length 676.8
  Top Layer w6: v1(580,815) 549.63,784.63 549.63,722.16 539.22,711.75 539.22,689.41 566.64,662 587.06,662 592.33,656.73 *.6@592.33,653.19 592.33,612.33 573.56,593.56 573.56,562.22 579.71,556.07 603.18,556.07 612.65,565.54 612.65,573.12 *.2@617.92,578.38
  Bottom Layer w6: U4.28@343.88,847.55 346.33,850 355,850 365.74,839.26 408.85,839.26 426.16,856.57 426.16,876.16 438.86,888.86 441.16,888.86 ccw(c441.16,917.55) 448.48,889.81 cw(c449.98,884) 449.98,890 505,890 v1(580,815)